# Altium PCB PCB1.(final) (1).PcbDoc (part 2 of 2)
Units mm, origin at the board's own origin, x right, y up, seen from the top; angles counter-clockwise.
Board outline 85 x 55 mm, 2 copper layers (Top Layer, Bottom Layer); 59 components, 57 nets, 310 pads, 123 vias.
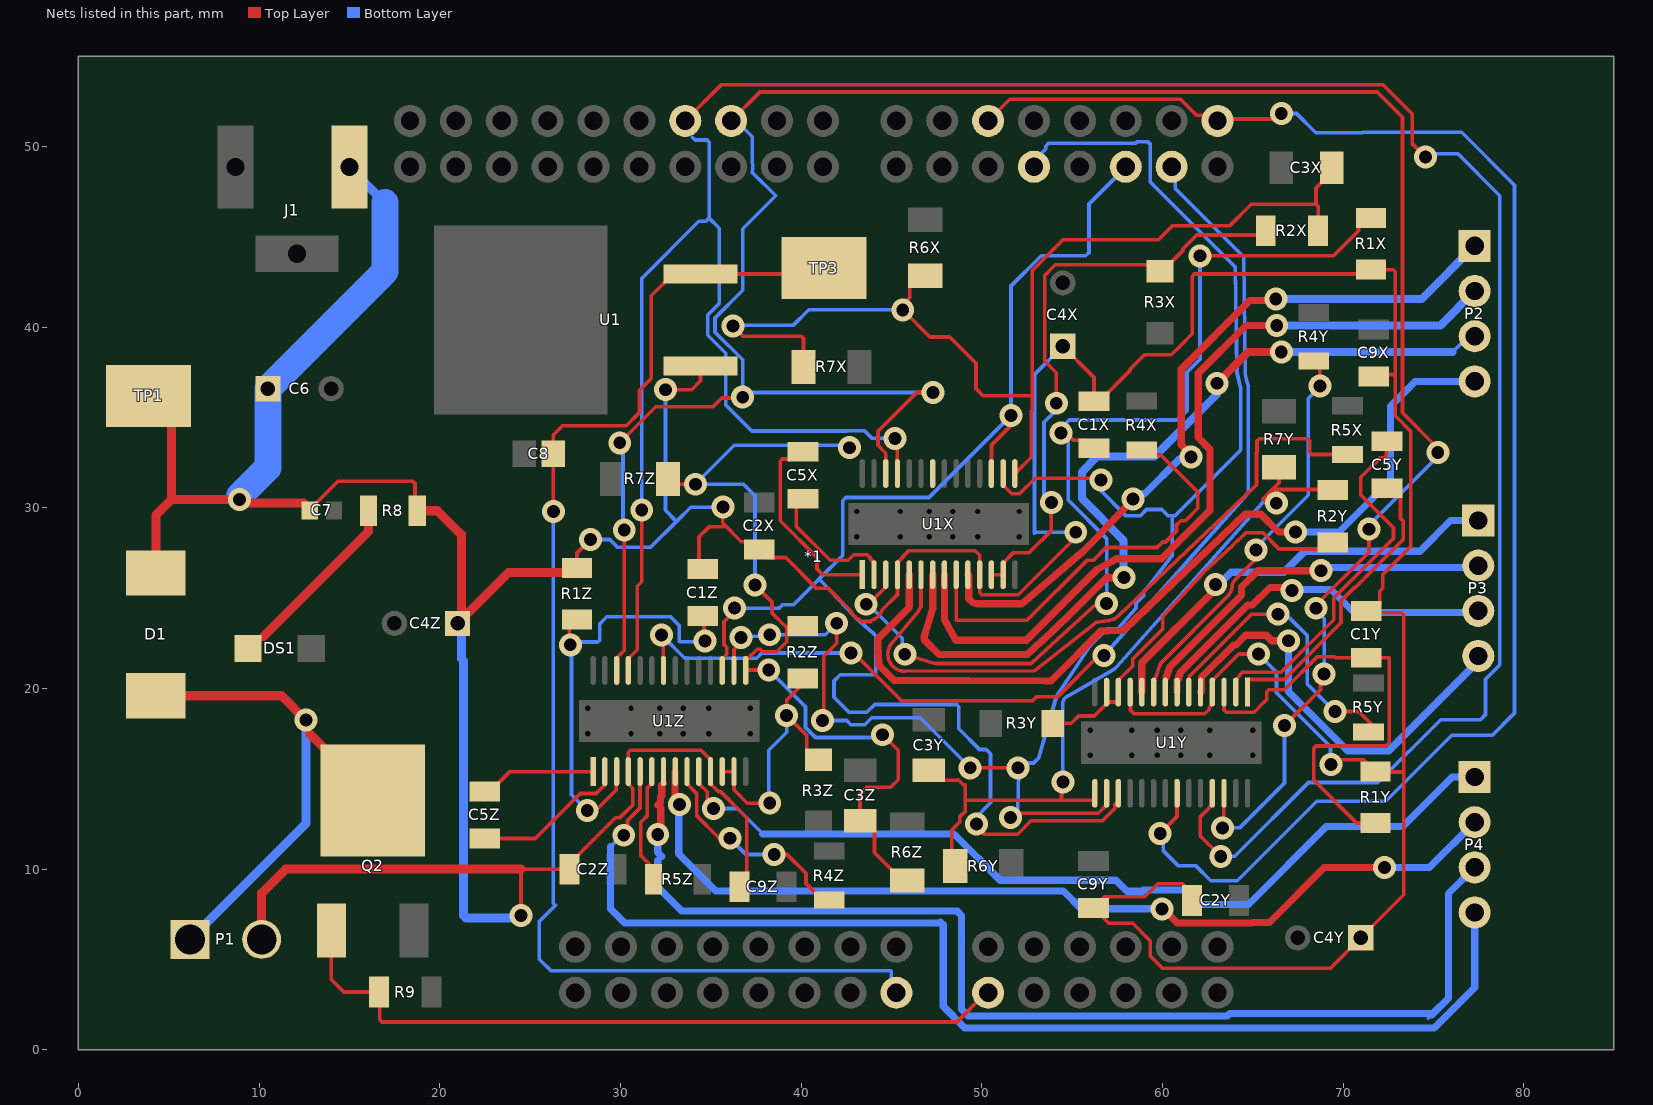
[diagram p2: the nets of this part, all layers, seen from the top]

## Via types
v1: diameter 1.27, hole 0.711, Top Layer to Bottom Layer, 123 vias

## Nets (pads, with @x,y where several pads share a name; then routed paths per layer and width w, separated by ;. In a path a pad name is that pad's centre, name@x,y a point inside that pad or via, vN(x,y) a via of type N, cw(c..) or ccw(c..) an arc to the next point about the centre after c; other vN are vias at no path point) (continued)
MODEL_1: *1.J2_8 U1X.25 U1Y.25 U1Z.25 | length 156.6
  Top Layer w0.203: U1Z.25@30.439,21 30.439,21.65 30.932,22.144 30.932,25.654 31.183,25.904 v1(31.183,29.877) ; *1.J2_8@33.592,51.422 35.599,53.428 72.205,53.428 73.841,51.792 73.841,50.138 v1(74.561,49.418) ; v1(45.199,33.848) 45.32,33.727 45.32,31.919 U1X.25@45.339,31.9 ; U1Y.25@62.764,14.2 62.764,13.576 62.689,13.502 62.687,13.502 62.568,13.383 62.568,13.362 62.09,12.883 62.09,11.852 v1(63.233,10.709)
  Bottom Layer w0.203: v1(31.183,29.877) 31.183,42.7 34.344,45.862 34.734,45.862 34.912,46.04 ; 33.985,50.52 34.147,50.358 34.792,50.358 34.912,50.239 34.912,46.04 ; v1(45.199,33.848) 43.932,33.848 43.511,34.269 42.534,34.269 42.519,34.254 37.272,34.254 35.83,35.696 35.83,38.556 34.829,39.557 34.829,40.673 35.47,41.314 35.47,45.481 34.912,46.04 ; v1(63.233,10.709) 64.004,10.709 68.093,14.798 71.929,14.798 75.404,18.273 77.604,18.273 77.888,18.557 77.888,20.512 78.682,21.306 78.682,47.278 76.364,49.596 74.739,49.596 v1(74.561,49.418)
MODEL_2: *1.J2_6 U1X.26 U1Y.26 U1Z.26 | length 142.9
  Top Layer w0.203: U1Z.26@29.789,21 29.789,21.676 30.213,22.1 v1(30.213,28.768) ; v1(29.964,33.599) 31.965,35.6 35.132,35.6 35.617,36.085 36.73,36.085 v1(36.77,36.125) ; *1.J2_6@36.132,51.422 37.733,53.022 71.897,53.022 73.291,51.628 73.291,35.261 75.247,33.305 v1(75.247,33.061) ; U1X.26@44.689,31.9 44.689,33.029 44.259,33.459 44.259,34.237 46.406,36.385 v1(47.31,36.385) ; v1(63.334,12.283) 63.395,12.344 63.395,14.181 U1Y.26@63.414,14.2 ; v1(66.763,17.948) 68.752,19.936 68.752,20.605 v1(68.956,20.809) ; v1(68.497,24.441) 68.497,24.609 71.437,27.549 v1(71.437,28.819)
  Bottom Layer w0.203: v1(29.964,33.599) 30.03,33.599 30.149,33.48 30.149,28.831 v1(30.213,28.768) ; *1.J2_6@35.686,51.511 *1.J2_6@35.969,51.511 ; *1.J2_6@36.35,51.485 *1.J2_6@36.426,51.485 ; *1.J2_6@36.426,51.409 37.24,50.595 37.299,50.536 37.299,49.134 cw(c36.132,48.882) 37.299,48.629 37.299,48.565 38.595,47.27 36.77,45.445 36.77,42.039 35.235,40.504 35.235,39.726 36.77,38.191 36.77,36.085 37.07,36.385 v1(47.31,36.385) ; v1(63.334,12.283) 64.274,12.283 66.763,14.773 v1(66.763,17.948) ; v1(68.497,24.441) 68.497,24.323 68.956,23.865 v1(68.956,20.809) ; v1(71.437,28.819) 71.437,29.035 75.247,32.845 v1(75.247,33.061)
Net*1_J24_2: *1.J24_2 Q2.1 R9.2 | length 41.6
  Top Layer w0.203: Q2.1@13.999,6.6 13.999,3.89 14.689,3.2 R9.2@16.639,3.2 16.689,3.15 16.689,1.658 16.808,1.539 48.628,1.539 *1.J24_2@50.174,3.086 ; *1.J24_2@50.341,3.327 *1.J24_2@50.404,3.39 ; *1.J24_2@50.404,3.263 *1.J24_2@50.534,3.263
Net*1_J25_16: *1.J25_16 C8.2 TP3.1 U1.3 | length 73.1
  Top Layer w0.203: v1(26.289,29.8) C8.2@26.289,33 26.289,34.03 26.798,34.539 30.319,34.539 30.976,35.196 31.053,35.273 31.053,36.509 31.71,37.165 31.71,41.736 32.914,42.94 U1.3@34.439,42.94 40.749,42.94 TP3.1@41.489,42.2
  Bottom Layer w0.203: v1(26.289,29.8) 26.289,8.119 26.408,8 25.514,7.106 25.514,5.011 26.141,4.384 44.952,4.384 44.994,4.343 *1.J25_16@44.994,3.443 ; *1.J25_16@45.084,3.252 *1.J25_16@45.378,2.958
NetC5_X-axis_1: C5X.1 U1X.2 | length 7.8
  Top Layer w0.203: C5X.1@40.108,30.506 39.738,30.136 39.738,28.971 41.614,27.095 42.615,27.095 42.924,27.405 43.665,27.405 43.843,27.226 43.843,27.171 44.039,26.976 U1X.2@44.039,26.3
NetC5_X-axis_2: C5X.2 U1X.1 | length 11.2
  Top Layer w0.203: C5X.2@40.489,32.75 40.444,32.705 38.968,32.705 38.849,32.586 38.849,29.285 40.881,27.253 40.881,26.609 41.19,26.3 U1X.1@43.389,26.3
NetC5_Y-axis_1: C5Y.1 U1Y.2 | length 20.2
  Top Layer w0.203: U1Y.2@64.064,19.8 64.064,20.476 64.259,20.671 64.259,20.726 64.437,20.905 66.573,20.905 69.481,23.813 69.481,25.009 72.707,28.235 72.742,28.235 72.791,28.284 72.791,28.898 70.98,30.71 70.98,31.689 72.072,32.781 72.283,32.781 72.402,32.9 72.402,33.652 C5Y.1@72.435,33.685
NetC5_Y-axis_2: C5Y.2 U1Y.1 | length 17.4
  Top Layer w0.203: U1Y.1@64.714,19.8 64.714,20.45 64.762,20.498 66.741,20.498 69.887,23.644 69.887,24.84 70.64,25.593 70.675,25.593 73.342,28.26 73.342,29.252 73.184,29.41 73.184,30.637 72.735,31.085 C5Y.2@72.435,31.085 72.241,31.085 C5Y.2@71.792,30.637
NetC5_Z-axis_1: C5Z.1 U1Z.2 | length 8.6
  Top Layer w0.203: C5Z.1@22.489,11.7 25.291,11.7 27.776,14.185 28.654,14.185 29.12,14.65 29.12,15.381 U1Z.2@29.139,15.4
NetC5_Z-axis_2: C5Z.2 U1Z.1 | length 6.5
  Top Layer w0.203: C5Z.2@22.489,14.3 22.789,14.3 23.889,15.4 U1Z.1@28.489,15.4
NetD1_1: D1.1 P1.1 Q2.4 | length 29.8
  Top Layer w0.203: P1.1@6.184,6.11 P1.1@6.28,6.206 ; v1(12.595,18.255) 12.799,18.051 12.799,17.489 ; Q2.4@16.289,13.8 Q2.4@16.289,14
  Top Layer w0.5: D1.1@4.289,19.6 11.25,19.6 v1(12.595,18.255) ; 12.799,17.489 Q2.4@16.289,14
  Bottom Layer w0.5: P1.1@6.184,6.11 12.595,12.521 v1(12.595,18.255)
NetDS1_1: DS1.1 R8.1 | length 10.5
  Top Layer w0.203: DS1.1@9.389,22.22 10.037,22.868 10.233,22.868
  Top Layer w0.5: 10.233,22.868 16.059,28.694 R8.1@16.059,29.84
NetP2_1: P2.1 U1X.10 | length 41.2
  Top Layer w0.203: v1@66.187,41.476 v1(66.281,41.57)
  Top Layer w0.4: U1X.10@49.239,26.3 49.28,26.259 49.28,24.975 49.497,24.758 49.778,24.69 52.236,24.69 55.635,27.612 56.243,28.22 v1(58.381,30.495) ; v1(61.592,32.819) 61.592,32.937 61.04,33.489 61.04,37.675 64.841,41.476 v1@66.187,41.476
  Bottom Layer w0.4: v1(58.381,30.495) 58.617,30.495 58.91,30.789 59.034,30.789 60.939,32.694 61.466,32.694 v1(61.592,32.819)
  Bottom Layer w0.45: v1(66.281,41.57) 74.358,41.57 P2.1@77.289,44.5
NetP2_2: P2.2 U1X.8 | length 45.8
  Top Layer w0.203: v1@66.332,40.096 v1(66.333,40.097)
  Top Layer w0.4: U1X.8@47.939,26.3 47.939,24.167 47.939,23.836 48.432,22.921 48.569,22.668 52.464,22.668 56.371,26.575 56.393,26.587 57.465,27.176 59.951,27.176 62.63,29.855 62.63,33.249 61.982,33.897 61.982,37.449 64.63,40.097 66.331,40.097 v1@66.332,40.096
  Bottom Layer w0.45: v1(66.333,40.097) 75.386,40.097 P2.2@77.289,42
NetP2_3: P2.3 U1X.7 | length 48.8
  Top Layer w0.4: U1X.7@47.289,26.3 47.289,24.432 46.822,22.932 46.822,22.706 47.64,21.888 52.526,21.888 53.352,22.631 54.832,24.055 55.613,24.831 56.915,26.133 57.591,26.133 v1(57.868,26.138)
  Top Layer w0.45: v1(63.02,36.895) 64.748,38.623 v1(66.585,38.623)
  Bottom Layer w0.203: 76.069,38.623 76.946,39.5 P2.3@77.289,39.5
  Bottom Layer w0.45: v1(57.868,26.138) 57.855,26.331 57.855,28.199 55.542,30.512 55.542,31.99 56.389,32.838 59.568,32.838 63.02,36.29 v1(63.02,36.895) ; v1(66.585,38.623) 76.069,38.623
NetP2_4: P2.4 U1X.5 | length 49
  Top Layer w0.4: U1X.5@45.989,26.3 45.989,24.479 44.376,22.867 44.259,22.749 44.259,22.418 44.299,21.298 45.146,20.452 53.503,20.411 53.835,20.411 53.952,20.529 56.588,23.165 57.014,23.181 57.715,23.216 57.863,23.223 64.582,29.643 65.453,29.643 66.431,28.665 v1(67.375,28.665)
  Bottom Layer w0.4: v1(67.375,28.665) 69.784,28.665 72.631,31.511 72.631,35.626 74.005,37 P2.4@77.289,37
NetP3_1: P3.1 U1Y.10 | length 23.6
  Top Layer w0.4: U1Y.10@58.864,19.8 58.864,21.424 62.827,25.387 v1(62.934,25.761)
  Bottom Layer w0.4: v1(62.934,25.761) 63.121,25.761 63.794,26.434 66.72,26.434 67.886,27.6 74.256,27.6 75.957,29.3 P3.1@77.489,29.3
NetP3_2: P3.2 U1Y.8 | length 21.3
  Top Layer w0.203: U1Y.8@60.164,19.8 60.164,20.476 60.205,20.517 60.21,20.523 60.26,20.621 60.21,20.621 ; P3.2@77.375,26.914 P3.2@77.489,26.8
  Top Layer w0.4: 60.21,20.621 60.426,21.21 64.379,25.162 64.379,25.62 65.28,26.522 v1(68.787,26.522)
  Bottom Layer w0.203: v1(68.787,26.522) v1@68.963,26.698 ; P3.2@77.386,26.698 P3.2@77.489,26.8
  Bottom Layer w0.4: v1@68.963,26.698 P3.2@77.386,26.698
NetP3_3: P3.3 U1Y.7 | length 20.3
  Top Layer w0.203: v1@66.721,25.593 67.012,25.593 v1(67.18,25.425)
  Top Layer w0.4: U1Y.7@60.814,19.8 60.814,20.454 60.91,20.55 60.91,20.679 60.977,20.746 60.977,20.874 64.722,24.619 64.979,24.619 65.953,25.593 v1@66.721,25.593
  Bottom Layer w0.203: P3.3@77.399,24.21 P3.3@77.489,24.3
  Bottom Layer w0.4: v1(67.18,25.425) 67.234,25.479 69.341,25.479 70.61,24.21 P3.3@77.399,24.21
NetP3_4: P3.4 U1Y.5 | length 24.4
  Top Layer w0.203: U1Y.5@62.114,19.15 U1Y.5@62.114,19.8
  Top Layer w0.4: U1Y.5@62.114,19.8 62.164,19.85 62.164,20.632 63.946,22.415 64.075,22.415 64.608,22.948 65.745,22.948 66.053,22.641 v1(66.977,22.641)
  Bottom Layer w0.203: P3.4@77.489,21.507 P3.4@77.489,21.8
  Bottom Layer w0.4: v1(66.977,22.641) 66.977,19.819 70.246,16.551 72.532,16.551 P3.4@77.489,21.507
NetP4_1: P4.1 U1Z.10 | length 49.7
  Top Layer w0.203: U1Z.10@34.339,15.4 34.37,15.368 34.37,14.718 34.806,14.282 34.806,13.706 v1(35.159,13.353)
  Bottom Layer w0.203: v1(35.159,13.353) 36.443,13.353 36.463,13.373 37.883,11.953
  Bottom Layer w0.4: 37.883,11.953 48.467,11.953 51.029,9.391 57.428,9.391 58.04,8.779 58.9,8.779 58.961,8.841 61.333,8.841 62.129,8.045 64.765,8.045 69.076,12.356 73.308,12.356 76.052,15.1 P4.1@77.289,15.1
NetP4_2: P4.2 U1Z.8 | length 52.9
  Top Layer w0.203: v1@33.023,14.017 33.235,13.805 33.278,13.761 v1(33.278,13.573) ; U1Z.8@33.023,15.384 U1Z.8@33.039,15.4 ; v1(59.978,7.803) v1@60.042,7.803
  Top Layer w0.4: v1@33.023,14.017 U1Z.8@33.023,15.384 ; v1@60.042,7.803 60.829,7.016 64.963,7.016 64.996,7.05 65.925,7.05 68.974,10.099 v1(72.3,10.099)
  Bottom Layer w0.203: 33.231,12.042 33.235,12.046 ; v1@33.235,13.706 33.278,13.662 v1(33.278,13.573)
  Bottom Layer w0.4: 33.231,12.042 33.231,10.834 35.277,8.788 53.671,8.788 54.531,8.788 55.516,7.803 v1(59.978,7.803) ; 33.235,12.046 v1@33.235,13.706 ; v1(72.3,10.099) 74.788,10.099 P4.2@77.289,12.6
NetP4_3: P4.3 U1Z.7 | length 65
  Top Layer w0.203: 32.067,13.545 32.236,13.376 ; v1(32.068,11.913) 32.236,12.081 v1@32.236,12.495 ; U1Z.7@32.389,14.75 U1Z.7@32.389,15.4
  Top Layer w0.4: 32.067,13.545 32.228,13.706 32.228,13.991 32.292,14.055 32.292,14.653 U1Z.7@32.389,14.75 ; v1@32.236,12.495 32.236,13.376
  Bottom Layer w0.203: 32.067,10.463 32.293,10.69 32.293,10.694 ; 48.762,7.559 48.882,7.44 ; 74.721,1.742 74.84,1.861
  Bottom Layer w0.4: 32.067,10.463 32.067,9.007 33.394,7.68 48.642,7.68 48.762,7.559 ; v1(32.068,11.913) 32.068,10.919 32.293,10.694 ; 48.882,7.44 48.882,2.244 49.256,1.869 63.592,1.869 63.732,2.01 74.84,2.01 ; 74.915,1.936 75.839,2.86 75.839,8.651 P4.3@77.289,10.1
NetP4_4: P4.4 U1Z.5 | length 66.9
  Top Layer w0.203: v1(30.187,11.877) 30.391,12.081 30.391,12.689 31.089,13.386 U1Z.5@31.089,15.4
  Bottom Layer w0.203: 29.451,11.242 30.086,11.877 v1(30.187,11.877) ; 47.713,7.076 47.866,6.924 ; P4.4@77.289,7.219 77.076,7.432 77.121,7.432 P4.4@77.289,7.6
  Bottom Layer w0.4: 29.451,11.242 29.451,7.813 30.244,7.02 47.657,7.02 47.713,7.076 ; 47.866,6.924 47.866,2.407 49.064,1.209 75.044,1.209 77.289,3.454 P4.4@77.289,7.219
NetQ1_X-axis_6: R5X.1 U1X.6 | length 38.1
  Top Layer w0.203: U1X.6@46.639,26.3 46.639,24.544 46.493,24.27 45.022,22.498 ccw(c45.744,21.897) 45.747,20.957 52.904,20.977 56.379,23.669 57.048,23.766 ccw(c56.914,24.696) 57.562,24.015 65.087,31.152 65.207,31.271 65.207,33.058 65.239,33.091 65.239,33.704 65.358,33.823 68.041,33.823 68.16,33.704 68.16,33.073 68.279,32.954 R5X.1@70.245,32.954
NetQ1_X-axis_9: R4X.1 U1X.9 | length 23.6
  Top Layer w0.203: U1X.9@48.589,26.3 48.589,23.776 52.513,23.776 55.828,27.092 56.177,27.092 56.886,27.801 59.709,27.801 60.02,28.112 60.173,28.112 60.785,28.724 60.785,29.05 61.025,29.29 61.28,29.29 61.963,29.973 61.963,30.876 59.899,32.94 59.134,32.94 R4X.1@58.863,33.211
NetQ1_X-axis_12: R2X.1 R3X.2 U1X.12 U1X.13 | length 34.8
  Top Layer w0.203: U1X.12@50.539,26.3 U1X.13@51.189,26.3 51.189,26.95 51.762,27.523 52.638,27.523 53.859,28.744 v1(53.859,30.293) ; v1(54.13,35.79) 54.13,37.477 53.484,38.124 53.484,42.866 54.072,43.455 59.532,43.455 R3X.2@59.88,43.108 60.005,43.108 61.147,44.25 61.147,44.341 61.906,45.1 65.486,45.1 R2X.1@65.724,45.339
  Bottom Layer w0.203: v1(53.859,30.293) 53.859,29.492 53.843,29.476 53.843,29.866 53.449,30.26 53.449,34.74 54.13,35.42 v1(54.13,35.79)
NetQ1_Y-axis_6: R5Y.1 U1Y.6 | length 17
  Top Layer w0.203: U1Y.6@61.464,19.8 61.482,19.819 61.482,20.665 64.931,24.114 v1(66.408,24.114) ; v1(69.548,18.725) 70.868,18.725 R5Y.1@71.943,17.65
  Bottom Layer w0.203: v1(66.408,24.114) 66.613,24.114 66.847,23.88 67.067,23.88 68.016,22.93 68.016,20.256 v1(69.548,18.725)
NetQ1_Y-axis_9: R4Y.1 U1Y.9 | length 22.1
  Top Layer w0.203: U1Y.9@59.514,19.8 59.545,19.832 59.545,20.397 59.921,21.419 63.598,25.096 ccw(c62.934,25.761) 63.874,25.761 64.026,26.024 65.176,27.175 v1(65.176,27.672) ; R4Y.1@68.375,38.122 68.719,37.778 v1(68.719,36.744)
  Bottom Layer w0.203: v1(65.176,27.672) 65.202,27.672 65.505,27.975 65.505,28.124 68.075,30.694 68.075,36.059 68.719,36.703 v1(68.719,36.744)
NetQ1_Y-axis_12: R2Y.1 R3Y.2 U1Y.12 U1Y.13 | length 21.7
  Top Layer w0.203: R3Y.2@53.943,18.074 54.962,18.074 55.362,18.475 56.231,18.475 56.925,19.169 57.008,19.252 57.519,19.252 57.564,19.296 57.564,20.45 58.359,21.245 58.359,21.633 60.025,23.299 60.025,23.975 62.241,26.395 cw(c62.934,25.761) 62.296,26.451 63.89,27.924 64.613,28.615 65.57,28.615 66.46,27.725 69.074,27.725 R2Y.1@69.436,28.087
NetQ1_Z-axis_6: R5Z.1 U1Z.6 | length 6.3
  Top Layer w0.203: U1Z.6@31.739,15.4 31.707,15.368 31.707,14.718 31.495,14.506 31.495,12.964 31.128,12.598 31.128,10.759 31.845,10.043 R5Z.1@31.845,9.668
NetQ1_Z-axis_9: R4Z.1 U1Z.9 | length 12.3
  Top Layer w0.203: U1Z.9@33.689,15.4 33.689,14.724 34.218,14.194 34.218,12.965 35.473,11.71 v1(36.06,11.71) ; v1(38.515,10.815) 39.227,10.815 40.271,9.771 40.271,9.207 41.18,8.297 R4Z.1@41.555,8.297
  Bottom Layer w0.203: v1(36.06,11.71) 36.955,10.815 v1(38.515,10.815)
NetQ1_Z-axis_12: R2Z.1 R3Z.2 U1Z.12 U1Z.13 | length 15.4
  Top Layer w0.203: U1Z.12@35.639,15.4 U1Z.13@36.289,15.4 36.289,14.394 37.028,13.655 v1(38.269,13.655) ; R2Z.1@39.424,20.55 R2Z.1@39.789,20.55 ; R2Z.1@40.098,20.55 40.246,20.403 39.204,19.361 v1(39.204,18.506) 40.316,17.394 40.316,16.584 40.839,16.061 R3Z.2@40.964,16.061
  Bottom Layer w0.203: v1(38.269,13.655) 38.214,13.71 38.214,16.584 39.204,17.575 v1(39.204,18.506)
RESET: *1.J1_9 U1X.16 U1Y.16 U1Z.16 | length 96
  Top Layer w0.203: U1Z.16@36.307,20.981 U1Z.16@36.289,21 36.289,22.151 36.674,22.536 v1(36.674,22.824) ; v1(41.185,18.227) 41.253,18.295 41.253,21.783 41.973,22.502 v1(41.973,23.612) ; v1(49.364,15.611) v1(52.006,15.611) ; U1X.16@51.189,31.9 51.189,31.25 51.664,30.775 52.099,30.775 52.963,31.639 56.516,31.639 v1(56.605,31.55) ; v1(51.599,12.868) 51.827,13.095 56.452,13.095 56.914,13.557 U1Y.16@56.914,14.2
  Bottom Layer w0.203: v1(36.674,22.824) 36.75,22.901 38.188,22.901 v1(38.264,22.977) 41.338,22.977 v1(41.973,23.612) ; v1(41.185,18.227) 42.523,18.227 42.752,17.998 43.53,17.998 43.911,18.379 46.596,18.379 v1(49.364,15.611) ; v1(51.599,12.868) 51.997,13.265 52.057,15.392 v1@52.057,15.611 ; v1(52.006,15.611) 52.006,15.705 52.176,15.875 52.869,15.875 53.151,16.157 54.139,19.579 55.989,22.347 cw(c56.771,21.825) 56.106,22.49 56.931,23.314 57.533,23.314 58.541,24.453 58.541,24.724 58.965,25.148 58.965,25.278 58.965,25.348 59.143,25.543 60.54,27.346 60.54,29.555 ; *1.J1_9@52.958,48.844 52.958,49.27 53.547,49.858 53.547,50.013 53.723,50.19 58.533,50.19 58.599,50.256 59.202,50.256 59.321,50.137 59.321,48.047 63.974,43.394 64.032,43.336 64.127,37.509 64.133,37.487 64.346,36.597 64.346,33.209 60.693,29.555 60.54,29.555 ; v1(56.605,31.55) 56.605,30.942 57.992,29.555 58.77,29.555 59.126,29.911 59.973,29.911 60.329,29.555 60.54,29.555
SLEEP: *1.J1_5 U1X.17 U1Y.17 U1Z.17 | length 81.6
  Top Layer w0.203: U1Z.17@35.639,21 35.67,21.032 35.67,21.682 35.882,21.894 35.882,22.287 35.734,22.435 35.734,23.696 36.309,24.27 v1(36.309,24.45) ; v1(49.718,12.498) 49.718,12.329 49.97,12.076 50.119,11.928 51.989,11.928 52.75,12.689 56.695,12.689 57.368,13.362 57.368,13.597 57.477,13.706 57.564,13.706 U1Y.17@57.564,14.2 ; U1X.17@50.539,31.9 50.539,33.473 51.625,34.559 v1(51.625,35.118)
  Bottom Layer w0.203: v1(36.309,24.45) 38.781,24.45 38.958,24.628 39.568,24.628 40.938,25.998 ; v1(49.718,12.498) 49.718,12.751 49.644,12.825 50.49,13.671 50.49,16.39 50.253,16.627 49.872,16.627 48.729,17.77 48.729,18.989 48.602,19.116 44.073,19.116 43.641,18.684 42.659,18.684 41.82,19.522 41.82,20.411 42.176,20.767 44.013,20.767 44.132,20.886 44.132,22.926 44.013,23.045 42.982,23.963 cw(c43.608,24.665) 42.922,24.022 41.202,25.856 41.06,25.998 40.938,25.998 ; *1.J1_5@57.988,48.869 55.943,46.824 55.943,44.135 55.765,43.957 53.301,43.957 51.625,42.281 v1(51.625,35.118) 47.082,30.575 42.487,30.575 42.309,30.396 42.309,27.369 40.999,26.059 40.938,25.998
STEP_1: U1X.22
STEP_2: *1.J1_2 *1.J1_12 U1Y.22 | length 88.7
  Top Layer w0.203: *1.J1_12@50.356,51.422 51.55,52.615 61.011,52.615 61.903,51.723 62.755,51.723 62.958,51.52 66.274,51.52 v1(66.585,51.831) ; v1(59.88,11.979) 60.814,12.912 U1Y.22@60.814,14.2
  Bottom Layer w0.203: v1(59.88,11.979) 60.058,11.801 60.058,11.005 60.865,10.197 61.84,10.197 62.675,9.362 64.147,9.362 68.541,13.757 72.364,13.757 76.021,17.414 78.269,17.414 79.495,18.64 79.495,47.862 76.568,50.79 71.089,50.79 71.064,50.764 68.49,50.764 67.424,51.831 v1(66.585,51.831)
STEP_3: *1.J1_3 U1Z.22 | length 61
  Top Layer w0.203: v1(32.278,22.96) 32.37,22.868 32.37,21.019 U1Z.22@32.389,21 ; v1(42.76,21.961) 42.923,21.961 45.509,19.375 45.569,19.315 52.804,19.315 53.024,19.535 54.192,19.535 56.482,21.825 v1(56.771,21.825)
  Bottom Layer w0.203: v1(32.278,22.96) 33.557,21.681 37.545,21.681 37.824,21.961 v1(42.76,21.961) ; v1(56.771,21.825) 64.731,30.82 64.752,30.842 64.752,36.765 64.638,37.13 cw(c65.535,37.41) 64.595,37.397 64.503,43.881 64.443,43.941 60.708,47.675 *1.J1_3@60.708,48.688 ; *1.J1_3@60.466,49.059 *1.J1_3@60.646,48.879
V3P3OUT_X-axis: C3X.1 R2X.2 R6X.1 R7X.1 U1X.15 | length 60.7
  Top Layer w0.203: v1(36.225,40.065) 36.785,39.505 40.019,39.505 40.139,39.386 R7X.1@40.139,37.8 ; R6X.1@46.87,42.837 46.595,42.837 46.021,42.264 46.021,41.641 45.628,41.249 v1(45.628,40.96) 47.127,39.461 48.227,39.461 49.689,38 49.689,36.6 50.078,36.21 52.793,36.21 ; U1X.15@51.839,31.9 52.742,32.804 52.742,35.354 ; 52.793,35.405 52.793,36.21 ; R2X.2@68.624,45.339 68.624,46.683 68.505,46.802 ; C3X.1@69.371,48.825 69.371,48.575 68.505,47.71 68.505,46.802 ; 52.793,36.21 52.793,43.135 54.504,44.846 59.786,44.846 60.548,45.608 63.721,45.608 64.915,46.802 68.505,46.802
  Bottom Layer w0.203: v1(36.225,40.065) 36.275,40.115 39.578,40.115 40.423,40.96 v1(45.628,40.96)
V3P3OUT_Y-axis: C3Y.1 R2Y.2 R6Y.1 R7Y.1 U1Y.15 | length 43.5
  Top Layer w0.203: C3Y.1@47.252,15.466 47.801,14.918 48.726,14.918 ; R6Y.1@48.338,10.171 48.338,12.164 48.778,12.603 48.778,12.887 49.085,13.195 49.085,13.791 ; 48.689,14.955 48.726,14.918 ; v1(54.495,14.823) 54.419,14.747 54.419,13.807 ; U1Y.15@56.264,14.704 U1Y.15@56.264,14.2 56.264,13.852 56.219,13.807 54.419,13.807 ; R7Y.1@65.976,32.534 R7Y.1@66.052,32.457 ; v1(66.307,30.258) 65.819,30.258 65.575,30.501 65.634,30.56 66.087,31.013 ; R7Y.1@66.461,32.257 66.461,31.387 66.087,31.013 ; R2Y.2@69.436,30.987 69.411,31.013 66.087,31.013 ; 48.726,14.918 48.973,14.671 49.085,14.671 49.085,13.791 ; 49.085,13.791 49.102,13.807 54.419,13.807
  Bottom Layer w0.203: v1(54.495,14.823) 54.495,19.234 54.512,19.292 54.546,19.326 54.546,19.41 54.656,19.52 57.239,21.01 ccw(c56.771,21.825) 57.475,21.202 65.539,30.292 66.272,30.292 v1(66.307,30.258)
V3P3OUT_Z-axis: C3Z.1 R2Z.2 R6Z.1 R7Z.1 U1Z.15 | length 48.9
  Top Layer w0.203: R7Z.1@32.639,31.6 32.931,31.308 v1(34.15,31.308) ; U1Z.15@36.939,21 36.939,21.624 36.983,21.669 37.069,21.669 37.572,22.172 37.741,22.172 37.875,22.037 38.654,22.037 39.204,22.588 39.204,23.366 39.12,23.45 ; U1Z.15@36.941,21.002 36.96,21.021 v1(38.214,21.021) ; v1(37.452,25.72) 38.388,24.784 38.388,24.182 39.12,23.45 ; R2Z.2@39.489,23.45 39.12,23.45 ; v1@42.364,33.265 42.428,33.329 v1(42.683,33.329) ; v1(44.513,17.44) 45.376,16.576 45.376,14.95 44.958,14.532 43.637,14.532 43.268,14.163 C3Z.1@43.268,12.687 43.518,12.687 44.067,12.138 44.067,10.907 45.599,9.375 R6Z.1@45.874,9.375
  Bottom Layer w0.203: v1(37.452,25.72) 37.452,30.673 36.817,31.308 v1(34.15,31.308) 36.309,33.467 42.564,33.467 42.564,33.448 v1(42.683,33.329) ; v1(38.214,21.021) 40.246,18.989 40.246,17.838 40.796,17.287 44.36,17.287 v1(44.513,17.44)
VCP_X-axis: C1X.1 R1X.1 U1X.3 | length 58.2
  Top Layer w0.203: v1(43.608,24.665) 43.787,24.723 43.844,24.779 44.689,25.624 U1X.3@44.689,26.3 ; v1(45.744,21.897) 47.431,21.383 52.735,21.383 53.555,22.126 56.352,24.696 v1(56.914,24.696) ; v1(54.389,34.153) 54.657,34.153 55.059,33.751 55.77,33.751 C1X.1@56.219,33.302 ; v1(62.087,43.952) 69.469,43.952 70.853,45.336 70.853,45.587 71.301,46.036 R1X.1@71.553,46.036
  Bottom Layer w0.203: v1(43.608,24.665) 43.727,24.662 45.605,22.783 45.605,22.036 v1(45.744,21.897) ; v1@54.368,34.153 54.254,34.267 54.851,34.864 60.845,34.864 61.364,35.383 61.364,37.499 62.087,38.222 v1(62.087,43.952) ; v1(54.389,34.153) 54.798,33.744 54.798,30.426 56.914,28.31 v1(56.914,24.696)
VCP_Y-axis: C1Y.1 R1Y.1 U1Y.3 | length 26.9
  Top Layer w0.203: U1Y.3@63.414,19.8 63.414,18.808 63.537,18.684 65.087,18.684 65.366,18.964 65.366,18.989 65.773,19.395 65.773,19.81 65.892,19.929 66.747,19.929 68.567,21.749 69.529,21.749 69.578,21.7 72.564,21.7 72.564,16.998 72.386,16.819 68.508,16.819 68.389,16.7 68.389,14.917 70.749,12.556 R1Y.1@71.806,12.556
VCP_Z-axis: C1Z.1 R1Z.1 U1Z.3 | length 25.1
  Top Layer w0.203: v1(27.228,22.418) 27.165,22.482 27.165,23.456 R1Z.1@27.284,23.575 ; v1(28.165,13.245) 28.639,13.245 29.77,14.376 29.77,15.381 U1Z.3@29.789,15.4 ; C1Z.1@34.556,24.014 34.632,23.937 34.632,22.672 v1(34.683,22.621)
  Bottom Layer w0.203: v1(28.165,13.245) 27.292,14.118 27.292,22.355 v1(27.228,22.418) 27.381,22.57 28.747,22.57 28.866,22.689 28.866,23.586 29.247,23.967 32.778,23.967 33.261,23.485 33.261,22.596 34.658,22.596 v1(34.683,22.621)
VMA_X-axis: C1X.2 C1Y.2 C1Z.2 C2X.1 C2Y.1 C2Z.1 C4X.1 C4Y.1 C4Z.1 C6.1 C7.2 C9X.1 C9Y.1 C9Z.1 D1.2 J1.1 P1.2 R1X.2 R1Y.2 R1Z.2 R8.2 TP1.1 U1.1 U1X.4 U1X.11 U1Y.4 U1Y.11 U1Z.4 U1Z.11 | length 309.4
  Top Layer w0.203: TP1.1@3.889,36.2 TP1.1@5.154,34.935 ; v1(8.91,30.465) v1@9.112,30.263 ; C6.1@10.089,36.2 C6.1@10.489,36.6 ; P1.2@10.144,6.11 P1.2@10.144,6.525 ; C7.2@12.45,30.263 C7.2@12.799,29.915 ; C7.2@12.799,29.865 C7.2@12.799,29.915 ; R8.2@18.759,29.84 18.63,29.969 18.63,31.346 18.511,31.465 14.349,31.465 C7.2@12.799,29.915 ; C4Z.1@21.196,23.393 C4Z.1@20.989,23.6 C4Z.1@21.196,23.807 ; v1(24.498,7.432) 24.498,10 C2Z.1@27.189,10 27.189,10.3 29.742,12.853 29.981,12.853 30.682,13.554 30.682,14.48 30.439,14.724 U1Z.4@30.439,15.4 30.439,16.457 30.558,16.576 34.463,16.576 34.989,16.05 U1Z.11@34.989,15.4 34.989,14.724 35.417,14.295 35.546,14.295 37,12.842 37,9.611 C9Z.1@36.589,9.2 ; R1Z.2@27.346,26.425 R1Z.2@27.6,26.679 27.6,27.504 v1(28.342,28.247) v1@28.448,28.247 ; v1(32.499,36.54) 33.948,36.54 34.439,37.03 U1.1@34.439,37.86 ; C1Z.2@34.556,26.614 34.353,26.817 34.353,28.395 34.903,28.946 35.724,28.946 35.801,29.022 ; v1(35.674,30.038) 35.674,29.149 35.801,29.022 ; C4X.1@54.489,38.95 56.219,37.22 C1X.2@56.219,35.902 56.519,35.902 58.215,37.599 58.215,37.678 59.008,38.471 60.499,38.471 60.935,38.906 60.935,38.909 61.658,39.632 61.658,42.822 61.777,42.941 71.308,42.941 R1X.2@71.553,43.186 72.765,43.186 72.885,43.067 72.885,37.379 ; v1(55.205,28.65) 55.205,28.373 52.027,25.195 49.988,25.195 49.889,25.294 U1X.11@49.889,26.3 49.889,27.38 49.644,27.625 45.953,27.625 45.834,27.506 45.834,27.498 45.644,27.309 45.644,27.282 45.339,26.976 U1X.4@45.339,26.3 45.339,25.204 44.497,24.362 cw(c43.608,24.665) 43.91,23.775 43.848,23.713 43.346,23.713 43.302,23.757 43.273,23.787 cw(c43.608,24.665) 42.729,24.33 42.7,24.359 41.517,25.542 40.856,25.542 39.147,27.252 38.137,27.252 C2X.1@37.689,27.7 37.259,28.129 36.693,28.129 35.801,29.022 ; U1Y.11@58.214,19.8 58.232,19.781 58.232,19.15 58.232,18.808 58.432,18.608 62.344,18.608 62.589,18.853 62.589,18.949 62.764,19.124 62.764,20.424 62.838,20.498 62.84,20.498 62.959,20.617 62.959,20.638 64.23,21.91 v1(65.315,21.91) ; C2Y.1@61.366,8.93 61.112,9.185 59.741,9.185 59.027,8.471 57.912,8.471 57.91,8.473 56.802,8.473 C9Y.1@56.187,7.859 57.045,7 58.366,7 59.323,6.044 59.323,5.207 60.022,4.508 69.296,4.508 C4Y.1@70.989,6.2 73.367,8.579 73.367,15.382 ; v1(69.329,15.789) 69.329,15.814 69.572,16.058 71.155,16.058 R1Y.2@71.806,15.406 71.83,15.382 73.367,15.382 ; C1Y.2@71.289,24.3 71.589,24.3 72.037,24.748 72.037,25.382 72.199,25.544 72.199,26.308 73.748,27.857 73.748,30.081 73.748,34.229 72.885,35.093 72.885,37.379 ; C1Y.2@71.589,24.2 73.248,24.2 73.367,24.081 73.367,15.382 ; C9X.1@71.698,37.28 71.797,37.379 72.885,37.379
  Top Layer w0.5: D1.2@4.289,26.4 4.289,29.6 5.154,30.465 ; TP1.1@5.154,34.935 5.154,30.465 ; v1(8.91,30.465) 5.154,30.465 ; v1@9.112,30.263 C7.2@12.45,30.263 ; P1.2@10.144,6.525 10.144,8.675 11.469,10 24.498,10 ; R8.2@18.759,29.84 19.87,29.84 21.196,28.514 21.196,23.807 23.814,26.425 R1Z.2@27.346,26.425
  Bottom Layer w0.203: 21.196,21.656 21.323,21.529 ; 21.323,7.424 21.442,7.305 ; v1@24.371,7.305 v1(24.498,7.432) ; v1(28.342,28.247) 29.405,28.247 29.823,27.828 31.686,27.828 33.108,29.251 ; v1(32.499,36.54) 32.499,29.86 33.108,29.251 ; v1(35.674,30.038) 33.896,30.038 33.108,29.251 ; C4X.1@54.489,38.95 52.918,37.38 52.918,28.612 52.956,28.65 v1(55.205,28.65) ; v1(65.315,21.91) 66.322,20.903 66.322,19.76 69.303,16.779 69.303,15.814 v1(69.329,15.789)
  Bottom Layer w0.5: v1(8.91,30.465) v1@8.91,30.64 ; J1.1@15,48.866 16.965,46.901 ; C4Z.1@20.989,23.6 21.196,23.393 21.196,21.656 ; 21.323,7.424 21.323,21.529 ; 21.442,7.305 v1@24.371,7.305
  Bottom Layer w1.5: v1@8.91,30.64 10.489,32.219 C6.1@10.489,36.6 16.965,43.076 16.965,46.901
pads on no net: *1.J1_6 *1.J1_8 *1.J1_11 *1.J1_13 *1.J1_16 *1.J2_1 *1.J2_3 *1.J2_4 *1.J2_5 *1.J2_9 *1.J2_11 *1.J2_12 *1.J2_13 *1.J2_15 *1.J2_16 *1.J2_17 *1.J2_18 *1.J2_19 *1.J2_20 *1.J24_1 *1.J24_3 *1.J24_5 *1.J24_6 *1.J24_7 *1.J24_9 *1.J24_10 *1.J24_11 *1.J24_12 *1.J25_1 *1.J25_2 *1.J25_3 *1.J25_4 *1.J25_5 *1.J25_6 *1.J25_7 *1.J25_8 *1.J25_9 *1.J25_10 *1.J25_11 *1.J25_13 *1.J25_15 U1X.19 U1X.23 U1Y.19 U1Y.23 U1Z.19 U1Z.23

## Polygon pours and split planes (outlines as drawn)
GND on Top Layer "GND_L01_P003" (solid, pour order 3): -0.011,0 84.989,0 84.989,55 -0.011,55
GND on Bottom Layer "GND_L02_P004" (solid, pour order 4): -0.011,0 84.989,0 84.989,55 -0.011,55

## Keep-outs
Keep-Out Layer:
  the board outline again, w1.2

## Other copper
Top Layer:
  text "KokHing Puah" at 1.774,16.406 h0.8
  text "Yangyang Li" at 1.774,14.676 h0.8
  text "Pengxiao Han" at 1.774,12.881 h0.8
  text "Fuzhen Liu" at 1.774,11.244 h0.8

## Silkscreen, mask and mechanical layers (free items; w line width, h text height)
Mechanical 15:
  text "J2" at 18.264,45.984 h1
  text "J1" at 57.206,45.749 h1 r90
  text "J25" at 22.239,5.034 h1
  text "J24" at 48.281,3.074 h1 r90

## Text inside footprints (layer, text, board x,y; h text height)
C4X: Top Overlay "+" at 53.689,35.2 h1.52 r90
C4Y: Top Overlay "+" at 73.289,7.2 h1.52 r180
C4Z: Top Overlay "+" at 24.515,25.44 h1.52 r180
C6: Top Overlay "+" at 6.96,38.01 h1.52